# Altium PCB MyPCB1 — копия.PcbDoc
Units mm, origin at the board's own origin, x right, y up, seen from the top; angles counter-clockwise.
Board outline 134 x 67 mm, 4 copper layers (Top Layer, Difpairs1, Difpairs, Bottom Layer), stack 1.747 mm thick; 52 components, 66 nets, 241 pads, 385 vias.
Unrouted connection lines stored in the file: 186.
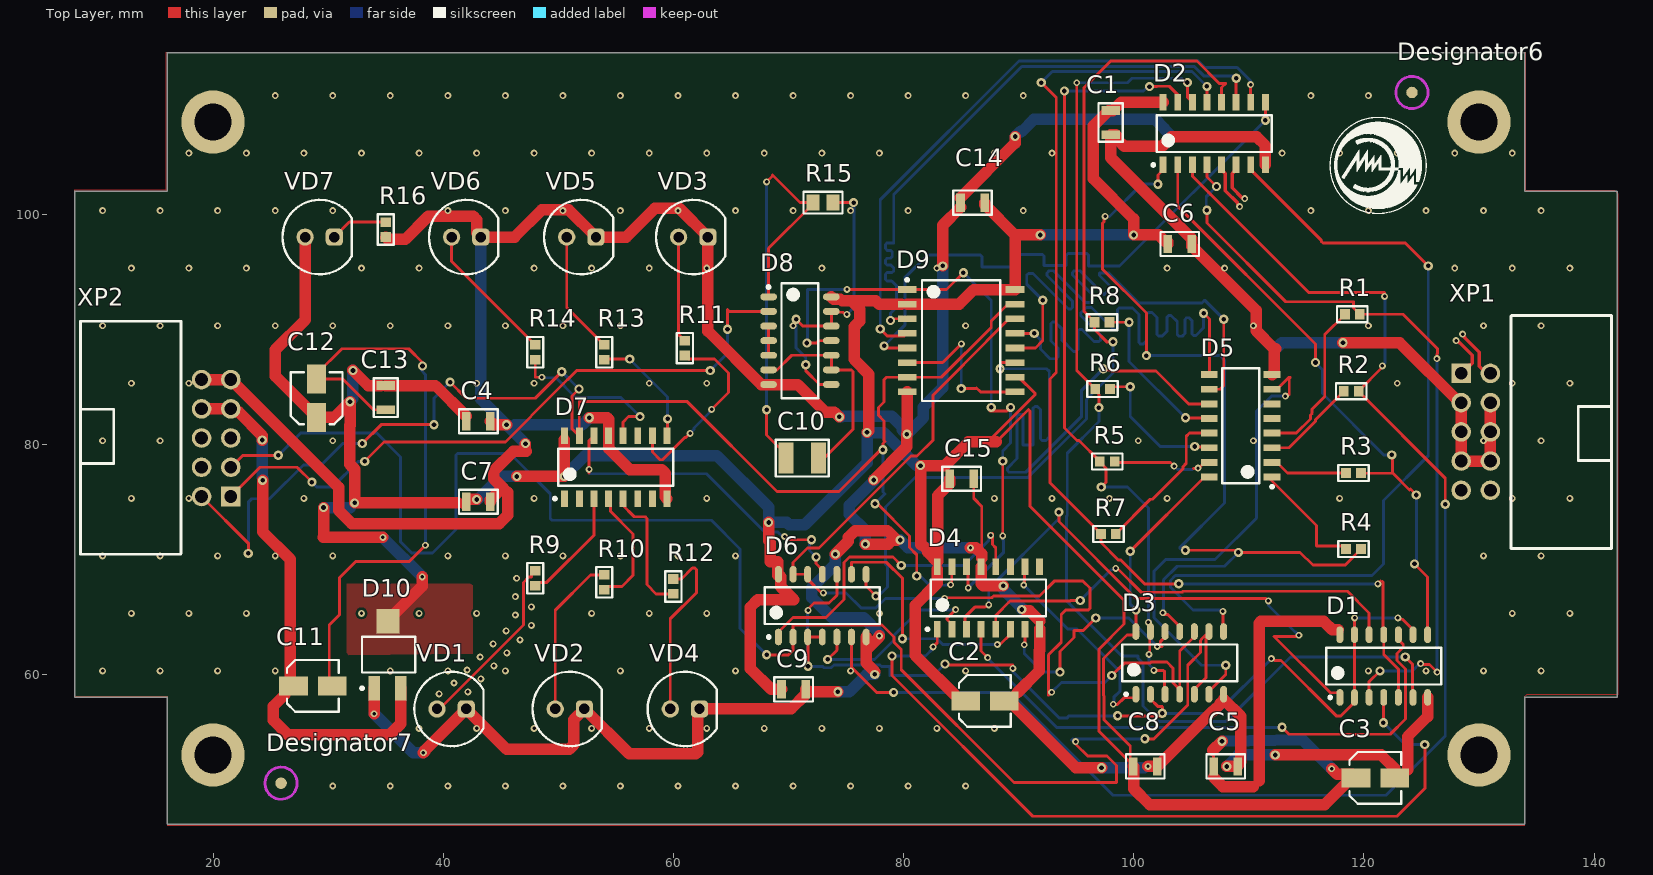
[diagram p0: Top Layer view]
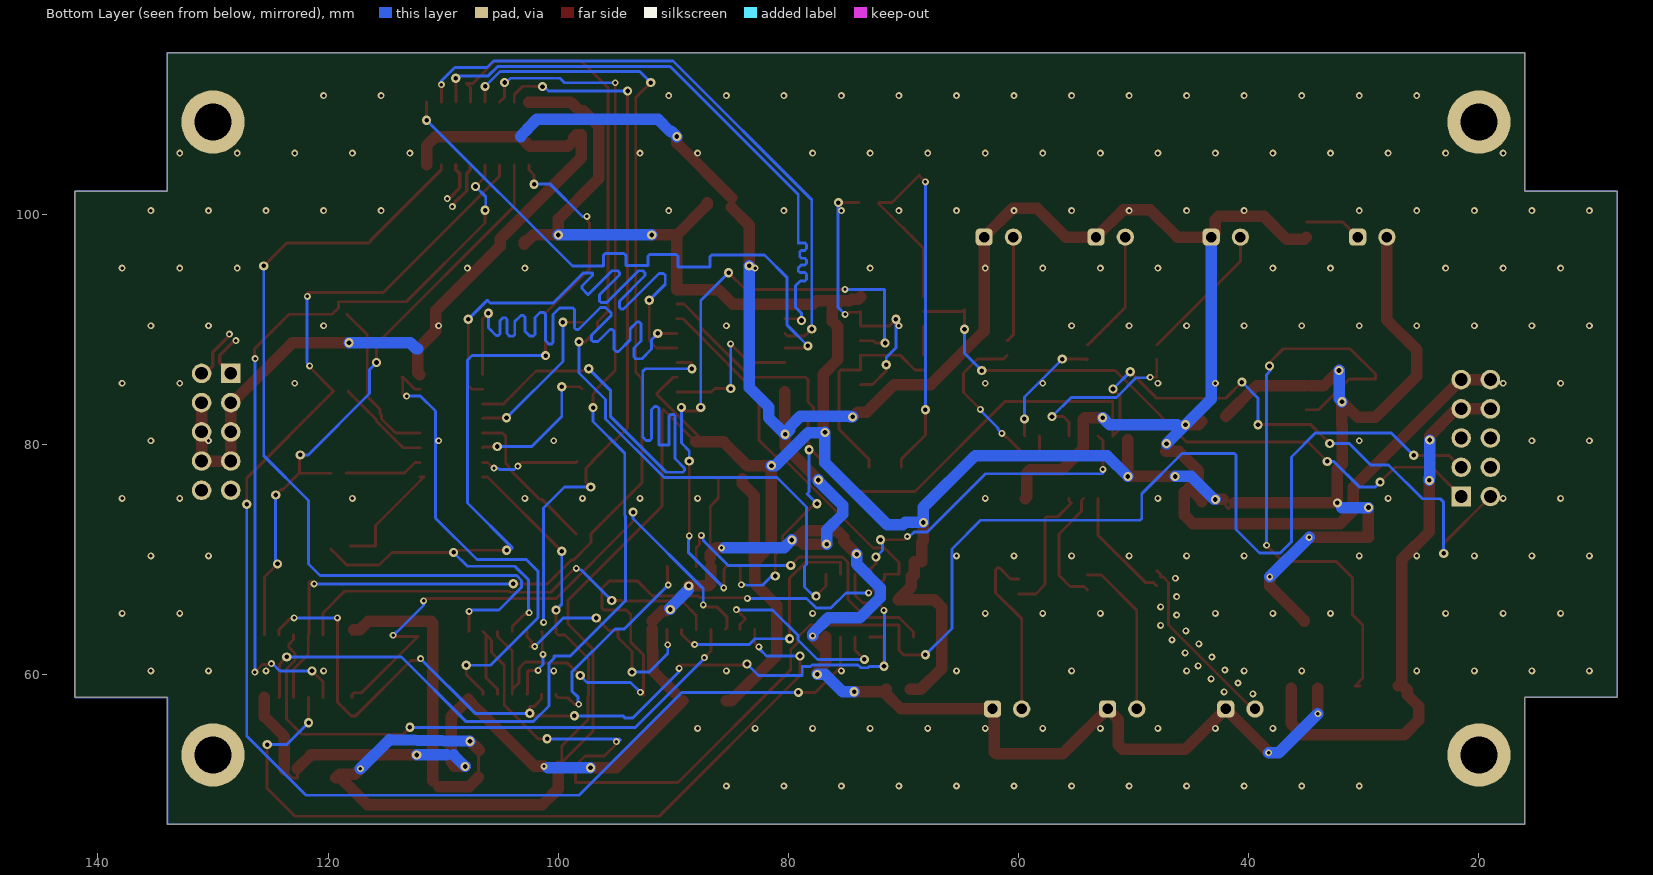
[diagram p1: Bottom Layer view, seen from below]
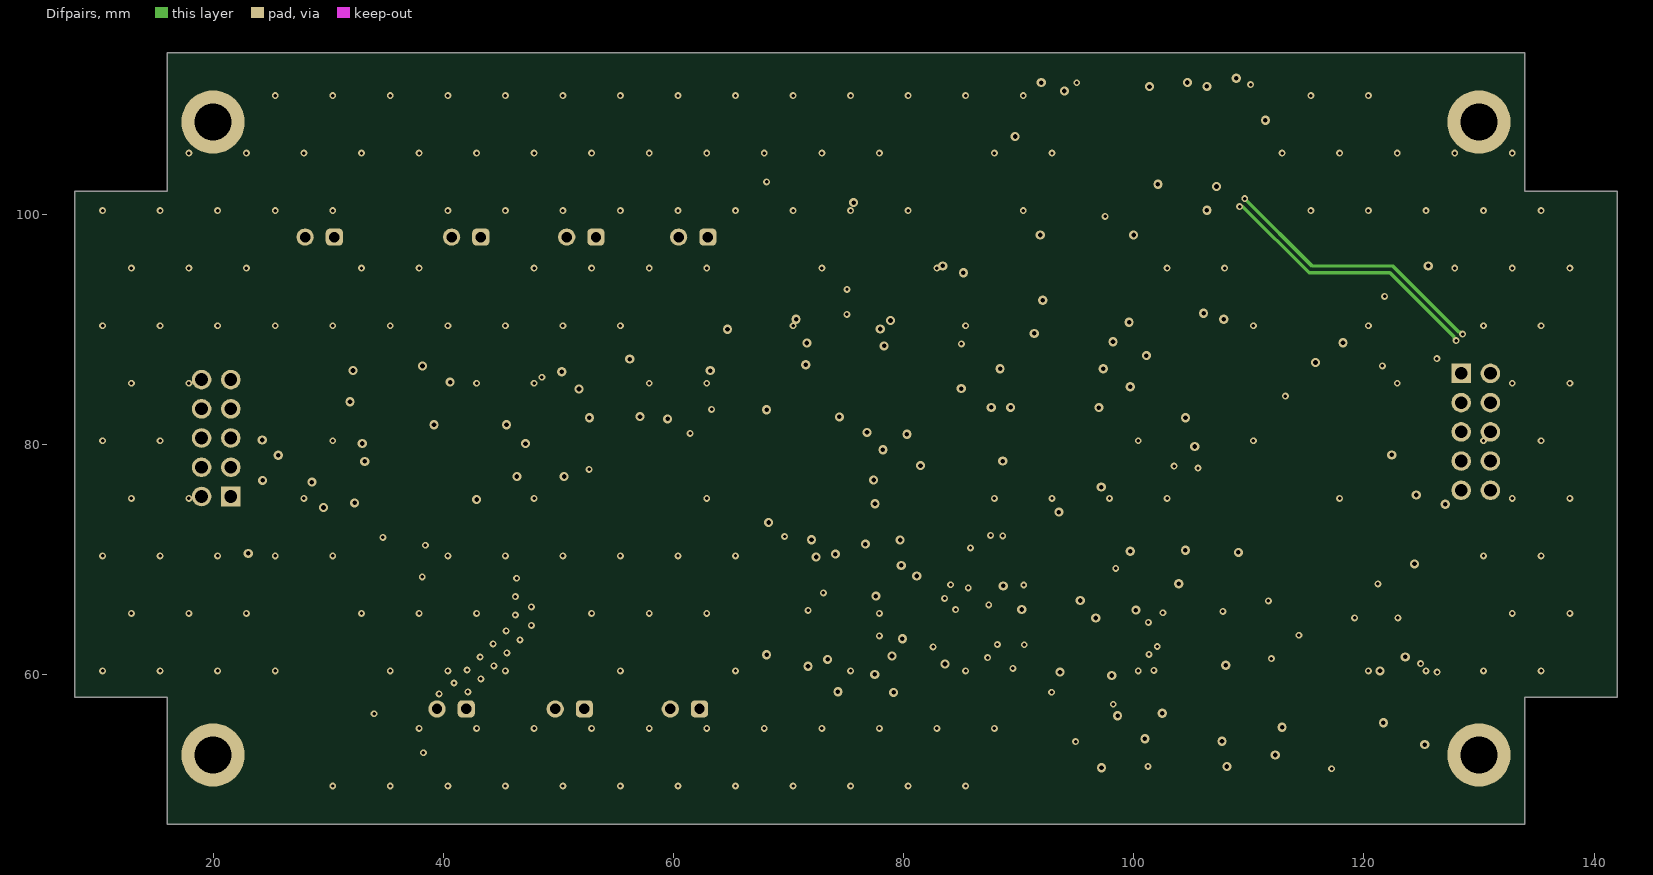
[diagram p2: Difpairs]
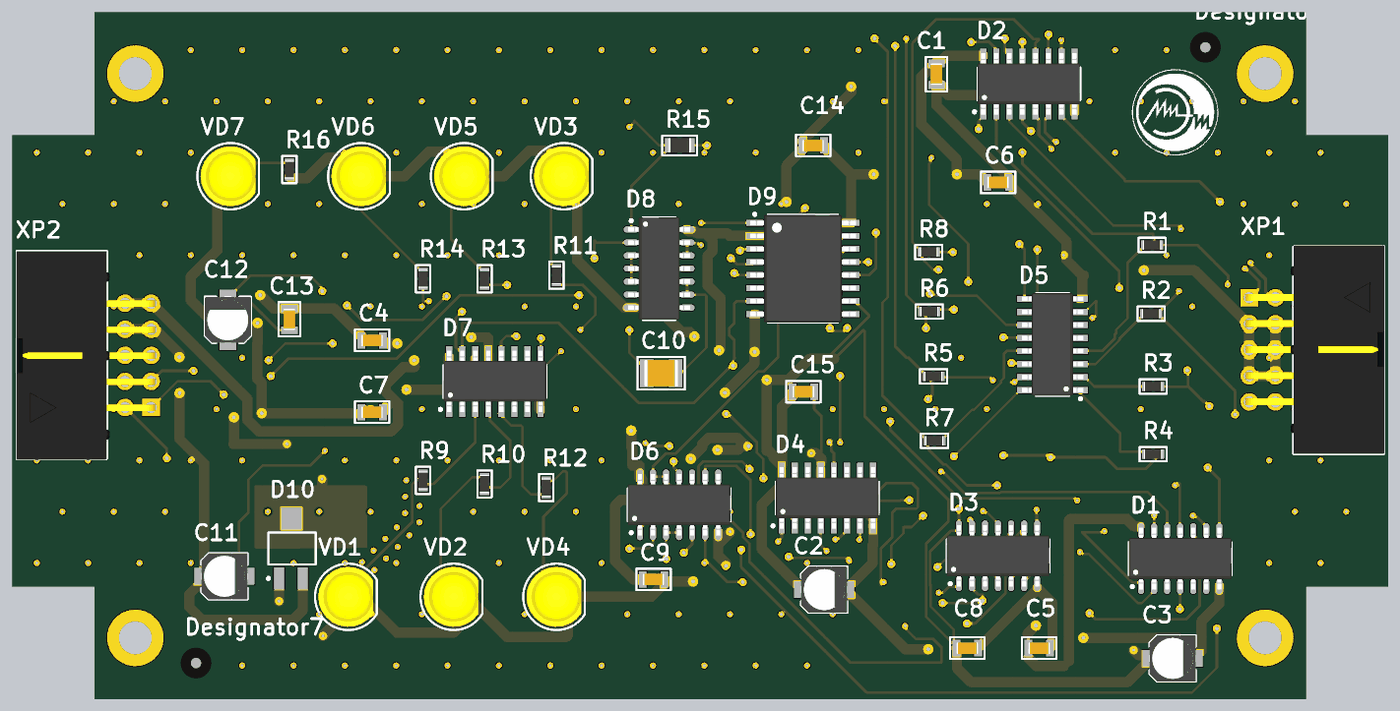
[diagram p3: 3D render of the assembled board from above, using the file's embedded part models]

## Layer stack, top to bottom
Top Solder: solder mask 0.0102, Solder Resist, Dk 3.5
Top Layer: signal copper 0.018
Dielectric 2: prepreg 0.0711, PP-006, Dk 4.1
Difpairs1: signal copper 0.035
Dielectric 1: core 1.4986, Core-043, Dk 4.3
Difpairs: signal copper 0.035
Dielectric 3: prepreg 0.0711, PP-006, Dk 4.1
Bottom Layer: signal copper 0.018
Bottom Solder: solder mask 0.0102, Solder Resist, Dk 3.5

## Board outline
16,47 134,47 134,58 142,58 142,102 134,102 134,114 16,114 16,102 8,102 8,58 16,58

## Design rules (kind name [scope] priority, off if disabled: settings)
BoardOutlineClearance [All] p1: gap=0.5 ignorepadtopadclearanceinfootprint=FALSE except(0: Arc-SplitContinuation Track-SplitContinuation SMDPad-SplitContinuation THPad-SplitContinuation Via-SplitContinuation Fill-SplitContinuation Poly-SplitContinuation Region-SplitContinuation Text-SplitContinuation)
Clearance [All] p1: gap=0.2 ignorepadtopadclearanceinfootprint=FALSE
DiffPairsRouting [All] p1: maxlimit=0.4 minlimit=0.2 mostfreqgap=0.3 toplayer_minwidth=0.2 toplayer_maxwidth=0.381 toplayer_prefwidth=0.3 midlayer1_maxgap=0.254 midlayer1_minwidth=0.2 midlayer1_maxwidth=0.381 midlayer1_prefwidth=0.3 midlayer2_maxgap=0.254 midlayer2_minwidth=0.2 midlayer2_maxwidth=0.381 midlayer2_prefwidth=0.3 bottomlayer_minwidth=0.2 bottomlayer_maxwidth=0.381 bottomlayer_prefwidth=0.3 maxuncoupledlength=12.7
PolygonConnect [All] p1: connectstyle=Direct reliefconductorwidth=0.254 reliefentries=4 polygonreliefangle="90 Angle" airgapwidth=0.254
RoutingVias [All] p1: holewidth=0.4 width=0.8 viastyle="Through Hole" minholewidth=0.3 minwidth=0.6 maxholewidth=0.9 maxwidth=1.27
SolderMaskExpansion [All] p1: expansion=0.102
Width [All] p1: maxlimit=1 minlimit=0.2 preferedwidth=0.25
29 further rules are at their usual default settings.

## Classes and differential pairs
net class S[0..5]: S0 S1 S2 S3 S4 S5
net class ABC[0..7]: ABC0 ABC1 ABC2 ABC3 ABC4 ABC5 ABC6 ABC7
component class ivt33_kuznecov_list2_9var: C10 C11 C12 C13 C14 C15 D8 D9 R15 R16 VD7 XP2
component class ivt33_kuznecov_list1_9var: C1 C2 C3 C4 C5 C6 C7 C8 C9 D1 D2 D3 D4 D5 D6 D7 R1 R2 R3 R4 R5 R6 R7 R8 R9 R10 R11 R12 R13 R14 VD1 VD2 VD3 VD4 VD5 VD6 XP1
differential pair Out2: +Out2_P -Out2_N
differential pair Out1: +Out1_P -Out1_N

## Components (designator, comment, footprint, x,y, rotation, side; value= is the part's Value field where it differs from the comment)
C1 "" 0805_N 98,107.95 r90 top
C2 "*" CA010M0010REB-0405 87.075,57.7 r0 top
C3 "*" CA010M0010REB-0405 121,51 r0 top
C4 "" 0805_N 43.05,82 r180 top
C5 "" 0805_N 108,52 r0 top
C6 "" 0805_N 104,97.4 r180 top
C7 "" 0805_N 43.05,75 r180 top
C8 "" 0805_N 101,52 r0 top
C9 "" 0805_N 70.45,58.7 r180 top
C10 "1210" K10-79_3.2_2.5(1210) 71.2,78.8 r0 top
C11 "*" CA010M0010REB-0405 28.675,59 r0 top
C12 "*" CA010M0010REB-0405 29,84 r90 top
C13 "" 0805_N 35,84.05 r90 top
C14 "" 0805_N 86,101 r0 top
C15 "" 0805_N 85.05,77 r180 top
D1 "74AC00SC" SO14-N 121.73,60.725 r90 top
D2 "SOIC-16" SO16-N 107,107 r90 top
D3 "74AC00SC" SO14-N 104,61 r90 top
D4 "SOIC-16" SO16-N 87.376,66.642 r90 top
D5 "SOIC-16" SO16-N 109.3,81.6 r180 top
D6 "74AC00SC" SO14-N 72.94,65.975 r90 top
D7 "SOIC-16" SO16-N 55,78 r90 top
D8 "74AC00SC" SO14-N 71,89 r0 top
D9 "MC14520BDWG \"Motorola\"" SOIC-16W-N 85,89 r0 top
D10 "LM1117DTX" LM1117DTX-5.0/NOPB 36.297,61.722 r90 top
Designator6 "Comment" PCBComponent_1 124.181,110.566 r0 top
Designator7 "Comment" PCBComponent_1 25.908,50.546 r0 top
R1 "Р1-12-0,1 * 5%-M-\"A\" АЛЯР.434110.005 ТУ" RES_0603_1608_N 119,91.3 r180 top
R2 "Р1-12-0,1 * 5%-M-\"A\" АЛЯР.434110.005 ТУ" RES_0603_1608_N 118.9,84.6 r180 top
R3 "Р1-12-0,1 * 5%-M-\"A\" АЛЯР.434110.005 ТУ" RES_0603_1608_N 119.1,77.5 r180 top
R4 "Р1-12-0,1 * 5%-M-\"A\" АЛЯР.434110.005 ТУ" RES_0603_1608_N 119.1,70.9 r180 top
R5 "Р1-12-0,1 * 5%-M-\"A\" АЛЯР.434110.005 ТУ" RES_0603_1608_N 97.7,78.5 r0 top
R6 "Р1-12-0,1 * 5%-M-\"A\" АЛЯР.434110.005 ТУ" RES_0603_1608_N 97.3,84.8 r0 top
R7 "Р1-12-0,1 * 5%-M-\"A\" АЛЯР.434110.005 ТУ" RES_0603_1608_N 97.8,72.2 r0 top
R8 "Р1-12-0,1 * 5%-M-\"A\" АЛЯР.434110.005 ТУ" RES_0603_1608_N 97.25,90.6 r0 top
R9 "Р1-12-0,1 * 5%-M-\"A\" АЛЯР.434110.005 ТУ" RES_0603_1608_N 48,68.35 r90 top
R10 "Р1-12-0,1 * 5%-M-\"A\" АЛЯР.434110.005 ТУ" RES_0603_1608_N 54,68 r90 top
R11 "Р1-12-0,1 * 5%-M-\"A\" АЛЯР.434110.005 ТУ" RES_0603_1608_N 61,88.35 r90 top
R12 "Р1-12-0,1 * 5%-M-\"A\" АЛЯР.434110.005 ТУ" RES_0603_1608_N 60,67.65 r90 top
R13 "Р1-12-0,1 * 5%-M-\"A\" АЛЯР.434110.005 ТУ" RES_0603_1608_N 54,88 r90 top
R14 "Р1-12-0,1 * 5%-M-\"A\" АЛЯР.434110.005 ТУ" RES_0603_1608_N 48,88 r90 top
R15 "0805" RES_0805_2012_N 73,101 r0 top
R16 "Р1-12-0,1 * 5%-M-\"A\" АЛЯР.434110.005 ТУ" RES_0603_1608_N 35,98.65 r90 top
VD1 "*" LED_5mm 40.73,57 r0 top
VD2 "*" LED_5mm 51,57 r0 top
VD3 "*" LED_5mm 61.73,98 r0 top
VD4 "*" LED_5mm 61,57 r0 top
VD5 "*" LED_5mm 52,98 r0 top
VD6 "*" LED_5mm 42,98 r0 top
VD7 "*" LED_5mm 29.27,98 r0 top
XP1 "TE_1-1634689-0" BH-10R 129.73,81.08 r180 top
XP2 "TE_1-1634689-0" BH-10R 20.27,80.54 r0 top

## Footprints (in the part's own frame and the unit in brackets; to place one, negate y for a bottom-side part, rotate by r counter-clockwise, add the part's x,y. Pads: shape width x height; smd on the part's side, far side on the other; paste and mask are expansions set on the pad)
0805_N [mm] "Резистор, конденсатор"
  rect 0.75x1.6 smd: 1(-1.05,0) 2(1.05,0)
  silkscreen extent -1.67,-1.05 1.67,1.05, body extent -1.05,-0.58 1.05,0.58, height 1
BH-10R [mm] "Разъем угловой 2х5х2,54 типа ВН"
  rect 1.7x1.7 hole 1.1: 1(1.27,-5.08)
  round 1.7 hole 1.1: 2(-1.27,-5.08) 3(1.27,-2.54) 4(-1.27,-2.54) 5(1.27,0) 6(-1.27,0) 7(1.27,2.54) 8(-1.27,2.54) 9(1.27,5.08) 10(-1.27,5.08)
  silkscreen extent -11.8,-10.1 -3.05,10.15, body extent -11.85,-10.2 1.65,10.15, height 9.13
CA010M0010REB-0405 [mm] "Aluminum Electrolytic Capacitor, Body 4,30x4,30x6,30mm, IPC Medium Density"
  rect 2.5x1.65 smd: +(-1.675,0) -(1.675,0)
  silkscreen extent -2.25,-2.25 2.25,2.25, body extent -2.3,-2.25 2.3,2.25, height 6.3
K10-79_3.2_2.5(1210) [mm]
  rect 1.3x2.7 smd: 1(-1.4,0) 2(1.4,0)
  silkscreen extent -2.3,-1.6 2.3,1.6, body extent -1.65,-1.3 1.65,1.3, height 1.75
LED_5mm [mm]
  round 1.5 hole 0.9: A(-1.27,0)
  rrect50% 1.5x1.5 hole 0.9: C(1.27,0)
  silkscreen extent -3.24,-3.24 2.78,3.24, body extent -2.92,-2.92 2.41,2.92, height 10.71
LM1117DTX-5.0/NOPB [mm] "SOT223, 4-Leads, Body 6,50x7,00mm (avg), Pitch 2,30mm, IPC Medium Density"
  rect 2.15x1 smd: 1(-2.925,2.3) 2(-2.925,0)
  rect 2.15x2 smd: 3(2.9,1.1)
  silkscreen extent -3.05,-1.27 1.55,3.47, body extent -1.85,-1.27 1.85,3.35, height 1.8
PCBComponent_1 [mm]
  round 1 smd paste+0 mask+1: reper(0,0)
  Top Layer keep-out circle w0.254: c0,0 r1.397
RES_0603_1608_N [mm] "Chip Resistor, 2-Leads, Body 1,60x0,80mm, IPC Medium Density"
  rect 0.85x0.9 smd: 1(-0.65,0) 2(0.65,0)
  silkscreen extent -1.32,-0.7 1.33,0.7, body extent -0.87,-0.45 0.87,0.45, height 0.55
RES_0805_2012_N [mm] "Rezistor 0805"
  rect 1.15x1.4 smd: 1(-0.875,0) 2(0.875,0)
  silkscreen extent -1.7,-0.95 1.7,0.95, body extent -1.1,-0.7 1.1,0.7, height 0.6
SO14-N [mm]
  oval 1.45x0.6 smd: 1(-2.725,3.81) 2(-2.725,2.54) 3(-2.725,1.27) 4(-2.725,0) 5(-2.725,-1.27) 6(-2.725,-2.54) 7(-2.725,-3.81) 8(2.725,-3.81) 9(2.725,-2.54) 10(2.725,-1.27) 11(2.725,0) 12(2.725,1.27) 13(2.725,2.54) 14(2.725,3.81)
  silkscreen extent -2.85,-5 1.6,5, body extent -3,-5 3,5, height 1.45
SO16-N [mm] "SOIC, 16-Leads, Body 9,90x3,90mm, Pitch 1,27mm, IPC Medium Density"
  rect 1.45x0.6 smd: 1(-2.725,4.445) 2(-2.725,3.175) 3(-2.725,1.905) 4(-2.725,0.635) 5(-2.725,-0.635) 6(-2.725,-1.905) 7(-2.725,-3.175) 8(-2.725,-4.445) 9(2.725,-4.445) 10(2.725,-3.175) 11(2.725,-1.905) 12(2.725,-0.635) 13(2.725,0.635) 14(2.725,1.905) 15(2.725,3.175) 16(2.725,4.445)
  silkscreen extent -2.85,-5 1.6,5.42, body extent -3,-5 3,5, height 1.45
SOIC-16W-N [mm] "SOIC, 16-Leads, Body 10,30x7,50mm, Pitch 1,27mm, IPC Medium Density"
  rect 1.62x0.58 smd: 1(-4.69,4.445) 2(-4.69,3.175) 3(-4.69,1.905) 4(-4.69,0.635) 5(-4.69,-0.635) 6(-4.69,-1.905) 7(-4.69,-3.175) 8(-4.69,-4.445) 9(4.69,-4.445) 10(4.69,-3.175) 11(4.69,-1.905) 12(4.69,-0.635) 13(4.69,0.635) 14(4.69,1.905) 15(4.69,3.175) 16(4.69,4.445)
  silkscreen extent -4.81,-5.25 3.4,5.41, body extent -5.15,-5.25 5.15,5.25, height 2.65

## Part data
C1 C4 C5 C6 C7 C8 C9 C13 C14 C15: library part К10-79_0805_Н90, "Чип конденсатор 0805 Н90 ряд Е6", Case=0805, Manufacturer="ООО \"Кулон\"", Tolerance=+80%-20%, BOM="К10-79-*-B-*+80%-20%-Н90 АЖЯР.673511.004 ТУ", Created_by=Желобаев, Issue_date=19_12_2018, Name=К10-79, Name2="Конденсатор К10-79", TKE=Н90, TU="АЖЯР.673511.004 ТУ", Type=K10-79, Version=0, Weight=0.05
C2 C3 C11 C12: library part CA010M0010REB-0405, "Электролитический SND"
C10: library part К10-79_1210_Н30, "Чип конденсатор 1210 Н30 ряд Е6", Manufacturer="ООО \"Кулон\"", Tolerance=±20%, BOM="Конденсатор К10-79-*-B-*±20%-Н30 АЖЯР.673511.004 ТУ", Datum=19_12_2018, HelpURL=\\papa\Info\Altium_Library\Даташиты_и_ТУ\Конденсаторы_отечественные\К10-79_АЖЯР_673511_004ТУ.pdf, Hight=1.75, LibraryEngeneer=Желобаев, LiveStatus=производится, Name="Конденсатор К10-79", Packing=катушка, Permit MPSU=разрешен, Reliability=0.000005, Size=1210, TKE=Н30, TU="АЖЯР.673511.004 ТУ", Type=K10-79, Version=00, Weight=0.2
D1 D3 D6 D8: "4 элемента 2И-НЕ TTL SOIC-14", Case=SOIC-14, Manufacturer="ON Semiconductor", Power_Voltage="4.5 - 5.5 V", BOM="74AC00SC \"ON Semiconductor\"", Created_by=Желобаев, Issue_date=10.04.2019, Name=74AC00SC, Name2="Микросхема 74AC00SC", Version=0
D2 D5: library part 74HCT151D, "мультиплексор 8 канальный TTL", Manufacturer="NXP Semiconductors", Power_Voltage="4.5 -5.5 V", BOM="74HCT151D \"NXP Semiconductors\"", Case=SOIC-16, Created_by=Желобаев, Issue_date=05.04.2019, Name=74HCT151D, Name2="Микросхема 74HCT151D", Version=0
D4 D7: library part HCF4017BM1, "Декадный счетчик c 10 декодированными выходами", Manufacturer=STMicroelectronics, Power_Voltage="-0.5 -22 V", BOM="HCF4017BM1 \"STMicroelectronics\"", Case=SOIC-16, Created_by=Желобаев, Issue_date=05.04.2019, Name=HCF4017BM1, Name2="Микросхема HCF4017BM1", Version=0
D9: library part MC14520BDWG, "Два двоичных счетчика", Case=SOIC-16, Manufacturer=Motorola, BOM="MC14520BDWG \"Motorola\"", Created_by=Желобаев, Issue_date=6.01.2019, Name=MC14520BDWG, Name2="Микросхема MC14520BDWG", Version=0
D10: library part LT1117
R1 R2 R3 R4 R5 R6 R7 R8 R9 R10 R11 R12 R13 R14 R16: library part Р1-12-0,1-5%, "Резистор от 0,75 Ом до 10 МОм", Case=0603, Manufacturer="ОАО \"НПО \"Эркон\"", Tolerance=5%, Voltage=50, BOM="Р1-12-0,1 * 5%-M-\"A\" АЛЯР.434110.005 ТУ", Created_by=Желобаев, Issue_date=10.04.2019, Name=Р1-12-0,1, Name2="Резистор Р1-12-0,1", Size=0603, TKR=M, TU="АЛЯР.434110.005 ТУ", Type="Р1-12-0,1±5%-М-\"А\"", Version=00, Weight=0,005
R15: library part Р1-12-0,125-5%, "Резистор от 0,75 Ом до 2 МОм", Manufacturer="ОАО \"НПО \"Эркон\"", Tolerance=5%, Voltage=150, BOM="Р1-12-0,125 * 5%-M-\"A\" АЛЯР.434110.005 ТУ", Case=0805, Created_by=Желобаев, Issue_date=05_12_2018, Name=Р1-12-0,125, Name2="Резистор Р1-12-0,125", Size=0805, TKR=M, TU="АЛЯР.434110.005 ТУ", Type="Р1-12-0,125±5%-М-\"А\"", Version=00, Weight=0,01
VD1 VD2 VD3 VD4 VD5 VD6 VD7: library part 521-9466, "Светодиод,5мм,жёлтый", Manufacture=Dialight, BOM="521-9466 \"Dialight\"", Name=521-9466
XP1 XP2: "Вилка типа BH-10R угловая правая двухрядная 2х5х2.54", Case=BH-10R, Manufacturer="TE Connectivity", BOM="TE_1-1634689-0 \"TE Connectivity\"", Created_by=Желобаев, Issue_date=13.05.2019, Name=TE_1-1634689-0, Name2="Вилка угловая TE_1-1634689-0", Version=0

## Free pads (board coordinates)
  round 5.5 hole 3.2: M1(20,108) M2(130,108) M3(130,53) M4(20,53)

## Via types
v1: diameter 0.6, hole 0.3, Top Layer to Bottom Layer, 260 vias
v2: diameter 0.8, hole 0.4, Top Layer to Bottom Layer, 125 vias

## Nets (pads, with @x,y where several pads share a name; then routed paths per layer and width w, separated by ;. In a path a pad name is that pad's centre, name@x,y a point inside that pad or via, vN(x,y) a via of type N, cw(c..) or ccw(c..) an arc to the next point about the centre after c; other vN are vias at no path point)
+5V: C1.2 C2.+ C3.+ C4.2 C5.1 C6.2 C7.2 C8.1 C9.2 C12.+ C13.2 C14.2 C15.2 D1.14 D2.16 D3.14 D4.16 D5.16 D6.14 D7.16 D8.14 D9.2 D9.10 D9.16 D10.3 VD7.A | length 403.5
  Top Layer w0.25: C13.2@34.575,85.1 C13.2 ; 41.25,74.9 41.75,74.4 42,74.65 C7.2 C7.2@42.2,75.2 ; C4.2 C4.2@42,82.425 ; D9.2@79.79,92.175 D9.2 ; 87.325,80.2 91.445,84.32 91.445,84.399 90.019,85.825 D9.10 ; 88.049,80.2 90.856,83.007 91,82.863 91,74.608 99.162,66.446 99.162,64.37 97,62.208 97,55.046 C8.1@99.7,52.346 ; v2(99.7,70.705) 106.15,77.155 D5.16 ; C8.1 99.7,52.25 C8.1@99.7,52.346 ; v2(100.19,65.586) D3.14 100.19,63.587 100.028,63.425 99.417,63.425 97.375,61.383 97.375,58.153 97.434,58.093 97.434,56.045 99.7,53.78 C8.1@99.7,52.346 ; 106.875,53.399 106.95,53.324 C5.1 106.95,51.05 ; 110.395,50.241 110.9,50.746 ; 110.9,64.454 111.046,64.6 ; D1.14@117.758,63.878 117.92,63.717 D1.14
  Top Layer w1: VD7.A 28,90.8 25.4,88.2 25.4,85.925 C12.+ 30.525,82.325 v2(31.9,83.7) 31.9,81.668 31.869,81.637 31.869,78.259 32.3,77.828 v2(32.3,74.9) 41.25,74.9 ; v2(29.6,74.5) 29.6,71.942 29.558,71.9 v1(34.755,71.9) ; v2(32.156,86.411) 33.467,85.1 C13.2@34.575,85.1 ; C13.2 39.325,85.1 C4.2@42,82.425 ; D10.3 35.197,64.697 38.176,67.677 v1(38.176,68.478) ; C7.2@42.2,75.2 v2(42.9,75.2) ; v2(46.4,77.2) v2(50.5,77.2) D7.16@50.5,80.38 ; v2(68.275,73.203) 68.275,71.622 68.4,71.497 68.4,69.8 69.063,69.8 69.063,68.633 D6.14 69.33,68.5 69.33,67.624 70.477,66.477 67.323,66.477 66.7,65.854 66.7,60.5 68.5,58.7 C9.2 ; D8.14 73.925,92.61 74.512,92.61 74.672,92.45 77.597,92.45 77.872,92.175 D9.2@79.79,92.175 ; 75.476,92.45 76.182,91.743 76.182,90.686 75.71,90.213 75.71,87.371 76.987,86.093 76.987,81.187 v2(76.826,81.026) ; D9.2 84.825,92.175 86.095,93.445 D9.16 89.69,98.185 ; D4.16@82.931,69.142 82.931,67.926 81,65.995 81,61.675 84.975,57.7 C2.+ ; C15.2 84,76.575 82.955,75.53 82.955,69.85 82.931,69.792 82.125,70.598 82.125,70.764 81.642,71.247 81.476,71.247 v2(81.476,78.142) 83.578,78.142 85.636,80.2 87.325,80.2 88.049,80.2 ; C14.2 87.05,100.825 89.69,98.185 ; v2(91.886,98.185) 89.69,98.185 ; C8.1 99.994,51.956 99.994,50.074 101.376,48.692 116.592,48.692 118.9,51 C3.+ 119,51.325 117.675,51.325 v1(117.2,51.8) ; D2.16 98.9,109.725 98.175,109 C1.2 97.825,109 96.5,107.675 96.5,103.069 99.988,99.581 v2(99.988,98.185) 102.165,98.185 102.65,97.7 102.825,97.7 102.95,97.575 C6.2 ; 106.875,53.399 v2(107.675,54.198) ; 106.95,51.05 107.759,50.241 110.395,50.241 ; 110.9,50.746 110.9,64.454 ; 111.046,64.6 116.523,64.6 117.245,63.878 D1.14@117.758,63.878
  Bottom Layer w0.25: 31.9,74.5 v2(32.3,74.9) ; v2(99.7,70.705) 99.7,66.096 100.2,65.596 v2(100.19,65.586)
  Bottom Layer w1: v2(29.6,74.5) 31.9,74.5 ; v2(31.9,83.7) 32.156,83.956 v2(32.156,86.411) ; v1(34.755,71.9) v1(38.176,68.478) ; v2(42.9,75.2) 43,75.2 45,77.2 v2(46.4,77.2) ; v2(50.5,77.2) 52.312,79.012 63.788,79.012 68.275,74.525 v2(68.275,73.203) 69.856,73.203 70.059,73 71.425,73 76.826,78.401 v2@76.826,81 ; v2(76.826,81.026) v2@76.826,81 ; v2(81.476,78.142) 81.147,78.142 78.29,81 v2@76.826,81 ; v2(91.886,98.185) v2(99.988,98.185) ; v2(107.675,54.198) 114.7,54.3 v1(117.2,51.8)
+9V: C11.+ D10.2 XP2.7 XP2.8 | length 48.1
  Top Layer w0.25: XP2.7 XP2.7@21.817,82.803 ; C11.+@26.7,59.3 C11.+
  Top Layer w1: XP2.8 XP2.7 ; XP2.7@21.817,82.803 22.226,82.803 24.282,80.747 v2(24.282,80.366) ; v2(24.3,76.86) 24.3,72.4 26.7,70 C11.+@26.7,59.3 ; C11.+ 26.575,59 26.25,58.675 26.25,58.25 25.248,57.248 25.248,56.007 26.492,54.762 35.357,54.762 36.297,55.702 D10.2
  Bottom Layer w1: v2(24.282,80.366) 24.282,77.118 24.3,77.1 v2(24.3,76.86)
ABC0: D1.3 D2.4 R1.1 | length 67.2
  Top Layer w0.25: v2(106.365,100.33) 106.365,99.235 113.22,92.38 119.1,92.38 119.1,91.85 119.325,91.625 119.35,91.625 119.65,91.325 R1.1 123.4,91.3 126.4,88.3 126.4,87.9 126.351,87.851 v1(126.351,87.441) ; D2.4 106.365,103.235 v2(107.2,102.4) ; D1.3 120.46,59.36 v2(121.4,60.3) ; v1(124.935,60.935) 125.002,60.868 125.695,60.868 v1(126.365,60.198)
  Bottom Layer w0.25: v2(106.365,100.33) 106.3,100.395 106.3,101.5 v2(107.2,102.4) ; v2(121.4,60.3) 124.2,60.3 v1@124.835,60.935 ; v1@124.739,60.935 v1@124.835,60.935 ; v1(124.935,60.935) v1@124.835,60.935 ; 126.351,61.051 v1(126.351,87.441) ; v1(126.365,60.198) 126.365,61.087
ABC1: D2.3 D6.6 R2.1 | length 125.6
  Top Layer w0.25: D6.6 75.48,60.62 77.665,58.435 v2(79.134,58.435) ; D2.3 105.095,103.305 115.2,93.2 121.8,93.2 v1(121.8,92.855) ; v1@121.615,86.716 v1(121.615,86.815) ; v1@121.628,86.703 119.55,84.625 R2.1 119.55,84.575 127.076,77.049 v2(127.076,74.778)
  Bottom Layer w0.25: v2(79.134,58.435) 89.265,58.435 98.2,49.5 121.925,49.5 127.076,54.651 v2(127.076,74.778) ; v1(121.615,86.815) 121.85,87.05 v1@121.85,92.805 ; v1(121.8,92.855) v1@121.85,92.805 ; v1@121.945,92.71 v1@121.85,92.805
ABC2: D1.8 D2.2 R3.1 | length 55.2
  Top Layer w0.25: D2.2 103.825,100.675 115.8,88.7 v2(115.8,87.1) ; R3.1 119.77,77.48 122.52,77.48 123.978,76.022 122.5,77.505 122.5,79 v2(122.425,79.075) ; 124.054,76.098 v2(124.562,75.59) ; v2(124.4,69.6) 125.54,68.46 D1.8
  Bottom Layer w0.25: v2(115.8,87.1) 115.8,87.079 116.4,86.479 116.4,84.4 121.725,79.075 v2(122.425,79.075) ; v2(124.4,69.6) 124.562,69.762 v2(124.562,75.59)
ABC3: D2.1 D3.11 R4.1 | length 76
  Top Layer w0.25: v1(97.511,99.797) 97.405,99.691 97.405,99.305 97.3,99.2 97.3,95.2 101.1,91.4 v2(101.1,87.7) ; v2(102.1,102.6) 102.1,103.395 102.555,103.85 D2.1 ; v1(102.54,65.36) 102.705,65.195 102.955,65.195 104,64.15 D3.11 ; v2(104.496,70.79) 108.91,70.79 v2(109.1,70.6) 114.464,70.6 115.57,69.494 118.379,69.494 119.2,70.315 119.2,70.325 119.75,70.875 R4.1
  Bottom Layer w0.25: v1(97.511,99.797) 97.897,99.797 100.7,102.6 v2(102.1,102.6) ; v2(101.1,87.7) 107.5,87.7 107.9,87.3 107.9,74.9 104,71 104.21,70.79 v2(104.496,70.79) ; v1(102.54,65.36) 102.54,65.684 ; 102.6,65.684 102.6,68.219 103.781,69.4 107.9,69.4 v2(109.1,70.6)
ABC4: D2.15 D3.3 D3.13 R5.1 | length 68.8
  Top Layer w0.25: v2(93.979,110.694) 93.979,81.409 95.072,80.317 95.258,80.317 97.05,78.525 R5.1 97.05,78.465 97.6,77.915 97.6,76.696 v2(97.18,76.276) ; v1(101.27,64.516) v1@101.27,64.541 ; v1(101.332,61.736) 101.396,61.8 101.396,63.661 D3.13 ; v2(101.371,111.075) 102.033,111.075 102.064,111.107 103.093,111.107 103.825,110.375 D2.15 ; v1(101.752,60.35) 102.591,60.35 102.665,60.276 102.665,58.34 D3.3
  Bottom Layer w0.25: v2(93.979,110.694) 100.841,110.694 101.222,111.075 v2(101.371,111.075) ; v2(97.18,76.276) 99.473,76.276 101.295,74.454 v1@101.295,64.541 ; v1(101.27,64.516) v1@101.295,64.541 ; v1(101.332,61.736) 101.332,60.866 101.752,60.445 v1(101.752,60.35) ; v1@101.46,64.575 101.329,64.575 v1@101.295,64.541
ABC5: D1.6 D2.14 R6.1 | length 101
  Top Layer w0.25: v1@95.047,111.404 v1(95.054,111.412) 95.054,86.421 96.65,84.825 R6.1 96.8,84.65 96.723,84.573 96.977,84.319 v2(96.977,83.185) ; v2(104.67,111.433) 104.67,110.155 105.097,109.727 D2.14 ; v2(123.596,61.519) 124.235,60.88 124.235,58.035 D1.6
  Bottom Layer w0.25: v1(95.054,111.412) 99.458,111.412 99.846,111.8 104.154,111.8 104.521,111.433 v2(104.67,111.433) ; v2(96.977,83.185) 96.977,81.977 94.225,79.225 94.225,73.8 94.169,73.744 94.169,66.394 98.964,61.6 100.354,61.6 100.375,61.579 100.375,61.4 100.813,60.962 100.813,57.268 102.189,55.892 107.992,55.892 113.619,61.519 v2(123.596,61.519)
ABC6: D1.5 D1.11 D2.13 R7.1 | length 95.8
  Top Layer w0.25: v2(91.973,111.43) 93.275,110.128 93.275,86.23 92.725,85.68 92.725,76.65 97.15,72.225 R7.1 97.15,71.45 98.675,69.925 98.9,69.925 100.957,67.869 v2(103.911,67.869) ; D2.13 v2(106.365,111.094) ; v1(121.22,67.869) 121.451,68.1 ; 121.633,68.068 121.665,68.035 121.665,63.515 D1.11 121.73,61.723 123,60.453 D1.5
  Bottom Layer w0.25: v2(91.973,111.43) 92.928,112.384 105.074,112.384 v2(106.365,111.094) ; v2(103.911,67.869) v1(121.22,67.869)
ABC7: D2.12 D6.8 R8.1 | length 78.2
  Top Layer w0.25: D6.8 76.75,67.674 77.355,67.068 77.343,67.056 v2(77.599,66.8) ; v2(98.2,88.9) 97.663,88.9 96.6,89.963 R8.1 96.6,90.625 95.675,91.55 95.675,110.975 98,113.3 105.496,113.3 107.438,111.358 108,111.358 107.635,110.993 D2.12
  Bottom Layer w0.25: v2(77.599,66.8) 77.8,66.8 78.6,67.6 78.6,69.375 78.435,69.54 78.435,74.535 81,77.1 90.8,77.1 95.9,82.2 95.9,83.9 98.2,86.2 v2(98.2,88.9)
GND: C1.1 C2.- C3.- C4.1 C5.2 C6.1 C7.1 C8.2 C9.1 C14.1 C15.1 D1.7 D2.8 D3.7 D4.8 D4.13 D5.8 D6.7 D7.8 D7.13 D8.7 D9.8 D10.1 R16.1 VD1.C VD2.C VD3.C VD4.C VD5.C VD6.C XP1.3 XP1.4 XP1.5 XP1.6 XP1.7 XP1.8 XP2.9 XP2.10 | length 459.2
  Top Layer w0.25: C4.1@43.887,82.212 C4.1@44.113,82.438 ; C4.1 44.1,81.75 C4.1@44.35,81.5 ; v2(77.5,60) v2@77.5,60.249 ; 79.272,71.679 79.421,71.679 v2(79.705,71.679) ; C14.1@84.95,100.575 C14.1 C14.1@84.95,101.425 ; C15.1 86.1,75.3 86.8,74.6 86.8,70.135 ; D4.13 86.776,69.402 D4.13@86.776,70.077 ; C2.- 89.175,57.7 C2.-@89.875,58.4 ; D4.8 D4.8@91.821,64.597 ; D3.7@107.648,57.598 107.648,57.783 D3.7@107.81,57.945 ; D3.7@107.81,57.85 D3.7@107.81,57.945 ; D3.7 D3.7@107.81,57.945 ; C3.-@122.675,51.823 C3.- 123.1,51 C3.-@123.8,51.7
  Top Layer w1: XP2.10 XP2.9 30.9,76.26 30.9,74.272 32.072,73.1 44.853,73.1 45.586,73.832 45.586,75.814 45,76.4 ; v1(33.997,56.58) D10.1 ; R16.1 35.2,97.8 36.7,97.8 38.7,99.8 42.6,99.8 42.9,99.5 42.9,98.37 VD6.C 46.2,98 48.581,100.381 50.889,100.381 VD5.C 55.9,98 58.4,100.5 60.5,100.5 VD3.C 63,89.832 67.642,85.19 D8.7 70.81,85.19 73.2,82.8 74,82.8 v2(74.428,82.372) ; v1(38.278,53.188) v1@38.456,53.365 ; v1@38.411,53.41 VD1.C 45.5,53.5 50.954,53.5 51.343,53.889 51.343,56.073 VD2.C 56.17,53.1 61.954,53.1 62.1,53.246 62.1,56.83 VD4.C 70.225,57 71.5,58.275 C9.1 71.7,58.5 v2(74.3,58.5) ; C7.1 44.1,75.175 45,76.075 45,76.4 ; C4.1 44.4,81.7 v2(45.5,81.7) ; v2(47.147,80.053) 47.147,79.453 47.2,79.4 46.1,79.4 44.4,77.7 44.4,77 45,76.4 ; v2(52.7,82.3) 54.254,82.3 54.365,82.189 D7.13 54.375,80.715 54.375,79.625 56.2,77.8 59,77.8 59.3,77.5 59.3,75.42 D7.8 ; v2(74.076,70.45) 75.203,71.577 75.203,71.903 75.8,72.5 78.6,72.5 v2@79.421,71.679 ; v2(76.683,71.323) 78.674,71.323 79.03,71.679 79.272,71.679 ; D6.7 76.75,62.124 ; v2(77.4,76.896) 80.289,79.786 v2(80.289,80.874) 80.31,80.894 D9.8 ; v2@77.5,60.249 76.75,60.999 76.75,62.124 ; v1(77.902,63.348) 77.902,63.276 76.75,62.124 ; v2(83.4,95.5) 83.4,99.025 C14.1@84.95,100.575 ; C14.1@84.95,101.425 89.695,106.17 v2(89.695,106.738) ; v1(85.818,71) 86.277,71 86.776,70.501 D4.13@86.776,70.077 ; D4.13 86.741,67.877 86.927,67.691 v2(88.671,67.691) ; C2.-@89.175,57.7 94.983,51.892 v2(97.206,51.892) ; C2.-@89.875,58.4 91.775,60.3 91.775,62.042 91.845,62.112 91.845,63.975 D4.8 ; v2@90.626,65.537 90.946,65.537 91.821,64.662 D4.8@91.821,64.597 ; v1(101.243,52) C8.2 106.9,56.85 106.954,56.85 107.54,57.436 107.54,57.49 D3.7@107.648,57.598 ; D3.7@107.81,57.85 109.293,56.367 109.293,52.418 109.05,52.175 C5.2 v2(108.1,52) ; D2.8 111.445,105.955 110.695,106.705 103.284,106.705 102.472,105.894 99.183,105.894 98.675,106.402 98.675,106.65 98.425,106.9 C1.1 98,104.9 105.05,97.85 C6.1 105.05,97.225 110.646,91.629 110.646,89.854 112.2,88.3 ; D5.8 112.2,86.22 112.2,88.3 ; v2(112.3,53) 121.498,53 C3.-@122.675,51.823 ; 112.349,88.3 112.2,88.3 ; v2(118.186,88.824) 123.106,88.824 128.31,83.62 XP1.3 XP1.5 XP1.7 XP1.8 XP1.6 XP1.4 ; C3.-@123.8,51.7 123.8,54.6 125.54,56.34 D1.7
  Bottom Layer w0.25: v2(45.5,81.7) 46.2,81.7 ; v1@85.6,71 v1(85.818,71) ; v2@88.7,67.35 v2@88.7,67.4 ; 109.1,53 109.7,53
  Bottom Layer w1: v1(33.997,56.58) 37.389,53.188 v1(38.278,53.188) ; VD6.C 43.27,83.93 v2(45.5,81.7) v2(47.147,80.053) ; 46.2,81.7 52.1,81.7 v2(52.7,82.3) ; v2(74.076,70.45) 74.076,69.576 72.041,67.541 72.041,66.667 73.786,64.922 76.53,64.922 77.902,63.551 v1(77.902,63.348) ; v2(74.3,58.5) 75.3,58.5 76.8,60 v2(77.5,60) ; v2(74.428,82.372) 74.651,82.372 74.701,82.423 78.974,82.423 79.9,81.497 79.9,81.263 v2(80.289,80.874) 81.705,82.29 81.705,83.229 81.737,83.229 81.737,83.261 83.4,84.924 v2(83.4,95.5) ; v2(76.683,71.323) 76.683,72.517 75.3,73.9 75.3,74.7 77.4,76.8 v2(77.4,76.896) ; v2(79.705,71.679) 80.384,71 v1@85.6,71 ; v2@88.7,67.35 90.3,65.75 v2(90.276,65.642) ; v2(89.695,106.738) 90.17,107.213 ; 90.242,107.142 91.329,108.229 101.875,108.229 102.639,107.465 102.616,107.442 103.279,106.779 103.279,106.7 ; v2(97.206,51.892) 97.214,51.9 100.9,51.9 ; v2(108.1,52) 109.1,53 ; 109.7,53 v2(112.3,53) ; 112.2,88.3 112.349,88.3 112.873,88.824 v2(118.186,88.824)
  other v1: 30.399,50.301 35.399,50.301 40.399,50.301 45.399,50.301 50.399,50.301 55.399,50.301 60.399,50.301 65.399,50.301 70.399,50.301 75.399,50.301 80.399,50.301 85.399,50.301 37.899,55.301 42.899,55.301 47.899,55.301 52.899,55.301 57.899,55.301 62.899,55.301 67.899,55.301 72.899,55.301 77.899,55.301 82.899,55.301 87.899,55.301 39.65,58.301 42.144,58.477 40.938,59.251 43.275,59.608 10.399,60.301 15.399,60.301 20.399,60.301 25.399,60.301 35.399,60.301 40.399,60.301 45.399,60.301 55.399,60.301 65.399,60.301 75.399,60.301 85.399,60.301 100.399,60.301 120.399,60.301 125.399,60.301 130.399,60.301 135.399,60.301 42.069,60.382 44.407,60.739 43.201,61.514 45.538,61.871 44.332,62.645 46.67,63.002 45.463,63.776 47.659,64.259 46.264,65.161 12.899,65.301 17.899,65.301 22.899,65.301 32.899,65.301 37.899,65.301 42.899,65.301 52.899,65.301 57.899,65.301 62.899,65.301 77.899,65.301 132.899,65.301 137.899,65.301 47.665,65.859 46.264,66.761 46.378,68.357 10.399,70.301 15.399,70.301 20.399,70.301 25.399,70.301 30.399,70.301 40.399,70.301 45.399,70.301 50.399,70.301 55.399,70.301 60.399,70.301 65.399,70.301 130.399,70.301 135.399,70.301 12.899,75.301 17.899,75.301 27.899,75.301 47.899,75.301 62.899,75.301 87.899,75.301 92.899,75.301 97.899,75.301 102.899,75.301 117.899,75.301 132.899,75.301 137.899,75.301 10.399,80.301 15.399,80.301 30.399,80.301 100.399,80.301 110.399,80.301 130.399,80.301 135.399,80.301 12.899,85.301 17.899,85.301 42.899,85.301 47.899,85.301 57.899,85.301 62.899,85.301 122.899,85.301 132.899,85.301 137.899,85.301 10.399,90.301 15.399,90.301 20.399,90.301 25.399,90.301 30.399,90.301 35.399,90.301 40.399,90.301 45.399,90.301 50.399,90.301 55.399,90.301 70.399,90.301 85.399,90.301 110.399,90.301 120.399,90.301 130.399,90.301 135.399,90.301 12.899,95.301 17.899,95.301 22.899,95.301 32.899,95.301 37.899,95.301 47.899,95.301 52.899,95.301 57.899,95.301 62.899,95.301 72.899,95.301 82.899,95.301 102.899,95.301 107.899,95.301 127.899,95.301 132.899,95.301 137.899,95.301 10.399,100.301 15.399,100.301 20.399,100.301 25.399,100.301 30.399,100.301 40.399,100.301 45.399,100.301 50.399,100.301 55.399,100.301 60.399,100.301 65.399,100.301 70.399,100.301 75.399,100.301 80.399,100.301 90.399,100.301 115.399,100.301 120.399,100.301 125.399,100.301 130.399,100.301 135.399,100.301 17.899,105.301 22.899,105.301 27.899,105.301 32.899,105.301 37.899,105.301 42.899,105.301 47.899,105.301 52.899,105.301 57.899,105.301 62.899,105.301 67.899,105.301 72.899,105.301 77.899,105.301 87.899,105.301 92.899,105.301 112.899,105.301 117.899,105.301 122.899,105.301 127.899,105.301 132.899,105.301 25.399,110.301 30.399,110.301 35.399,110.301 40.399,110.301 45.399,110.301 50.399,110.301 55.399,110.301 60.399,110.301 65.399,110.301 70.399,110.301 75.399,110.301 80.399,110.301 85.399,110.301 90.399,110.301 115.399,110.301 120.399,110.301
NetC10_1: C10.1 D8.1 R15.1 | length 40.8
  Top Layer w0.25: v2(68.1,83) 68.1,80.8 69.95,78.95 70.2,78.7 C10.1@70.2,78 ; v1(68.1,102.804) 68.6,103.304 68.6,103.4 71,101 R15.1 72.125,100.875 68.275,97.025 D8.1
  Bottom Layer w0.25: v2(68.1,83) v1(68.1,102.804)
NetC10_2: C10.2 D8.6 D8.9 D8.10 | length 18.6
  Top Layer w0.25: D8.6 69.01,86.46 70.28,87.73 D8.10 D8.9 75.454,86.46 75.6,86.314 75.6,81.3 73,78.7 C10.2@73,78
NetC11_-: C11.- C12.- C13.1 | length 53.3
  Top Layer w0.25: C11.- 30.775,59 30.099,59.676 30.099,64.287 30.988,65.176 30.988,68.402 32.41,69.825 37.059,69.825 v1(38.456,71.222) ; C13.1 33.942,83 31.267,85.675 C12.- 29,86.1 31.2,88.3 37,88.3 38.196,87.104 v2(38.196,86.8)
  Bottom Layer w0.25: v2(38.196,86.8) 38.196,86.496 38.1,86.4 38.475,86.025 38.475,71.933 ; v1(38.456,71.222) 38.456,71.933
NetD1_2: D1.2 D1.9 D1.13 D3.2 D6.3 D6.4 D6.10 | length 85.1
  Top Layer w0.25: v2(71.7,60.7) 71.7,63.22 D6.3 D6.4 ; v1(71.704,65.557) 71.704,65.681 72.216,66.192 73.518,66.192 74.21,66.885 D6.10 ; v2(83.6,60.9) 83.683,60.817 89.494,60.817 v1(89.494,60.518) ; v2(98.6,56.4) 102.272,56.4 v2(102.489,56.617) 102.489,57.175 102.439,57.225 102.085,57.225 101.46,57.85 D3.2 ; v1(111.966,61.366) 112.061,61.366 112.228,61.2 112.8,61.2 117.6,56.4 118.015,56.4 119.19,57.575 D1.2 D1.13 v1(119.19,64.91) ; v1(122.962,64.91) 123.078,64.795 123.35,64.795 124.27,63.875 D1.9
  Bottom Layer w0.25: v1@71.577,65.43 v1@71.651,65.505 ; v1(71.704,65.557) v1@71.651,65.505 ; v2(83.6,60.9) 82.6,59.9 78.8,59.9 78.8,60.7 78.092,60.7 77.967,60.825 73.95,60.825 73.7,60.575 73.1,60.575 72.975,60.7 v2(71.7,60.7) 71.651,60.749 v1@71.651,65.505 ; v1@89.512,60.229 93.544,56.196 94.179,56.196 94.382,56.4 v2(98.6,56.4) ; v2(102.489,56.617) 107.217,56.617 v1(111.966,61.366) ; v1@119.1,65 v1(119.19,64.91) v1(122.962,64.91)
NetD2_7: D2.7 D3.8 | length 73.8
  Top Layer w0.25: 107.747,65.049 v1(107.747,65.481) ; 107.755,65.049 107.755,63.78 D3.8 ; D2.7 110.175,103.85 116.3,97.725 116.3,97.646 116.446,97.5 123.6,97.5 v2(125.6,95.5)
  Bottom Layer w0.25: v1(107.747,65.481) 107.62,65.608 105.147,65.608 103.186,67.569 103.186,68.169 103.617,68.6 120.7,68.6 121.7,69.6 121.7,75.1 125.6,79 v2(125.6,95.5)
NetD3_4: D3.4 D3.10 D6.12 D6.13 D9.14 | length 91.9
  Top Layer w0.25: v1@72.84,67.105 71.67,68.275 D6.12 D6.13 70.4,69.726 71.649,70.975 72.645,70.975 80.638,78.967 81.167,78.967 82.575,80.375 82.575,84.275 85.2,86.9 85.2,86.935 89.17,90.905 D9.14 ; v1(83.566,66.599) 83.633,66.666 87.666,66.666 87.818,66.817 91.817,66.817 93.1,68.1 95.6,68.1 96.2,67.5 96.2,65.746 96.054,65.6 94.1,65.6 93.7,65.2 93.7,62.8 92.6,61.7 92.6,58.183 v1(92.862,58.445) ; v2(98.1,59.9) 99.175,60.975 101.4,60.975 101.501,61.075 102.891,61.075 103.4,60.566 103.4,59.3 D3.4@104,58.7 ; D3.4 D3.4@104,58.7 ; D3.10 105.27,63.3 104,62.03 D3.4@104,58.7
  Bottom Layer w0.25: v1(73.041,67.081) 75.006,67.081 76.327,65.761 77.585,65.761 78.423,66.599 v1(83.566,66.599) ; v1@92.862,58.471 v1(92.862,58.445) 93.717,59.3 97.5,59.3 v2(98.1,59.9)
NetD3_5: D3.5 D3.9 D6.2 XP2.3 | length 146.3
  Top Layer w0.25: XP2.3 22.575,79.035 v2(25.666,79.035) ; v2(68.1,61.7) 70,61.7 70.4,62.1 D6.2 70.4,64.276 70.424,64.3 78.116,64.3 79.175,63.241 79.175,62.8 79.8,62.175 79.8,60.4 89.6,50.6 98.5,50.6 98.5,52.071 97.671,52.9 96,52.9 v1@94.935,53.965 ; v1@94.945,53.975 v1(94.945,54.155) ; v2(100.971,54.4) 101.746,54.4 104.7,57.354 104.7,60.8 105.8,61.9 105.8,62.946 105.895,63.041 105.895,63.08 D3.9@106.274,63.459 ; D3.5 105.27,58.706 106.274,59.71 D3.9@106.274,63.459 ; D3.9 D3.9@106.274,63.459
  Bottom Layer w0.25: v2(25.666,79.035) 27.593,80.962 34.238,80.962 36.3,78.9 36.3,71.521 37.26,70.561 39.061,70.561 41.1,72.6 41.1,79.054 41.246,79.2 45.8,79.2 49.3,75.7 49.3,73.546 49.446,73.4 63.3,73.4 65.8,70.9 65.8,64 v2(68.1,61.7) ; 94.6,54.3 94.7,54.4 v1(94.945,54.155) ; v1@94.945,54.4 v2(100.971,54.4)
NetD3_6: D3.6 D5.7 | length 42.2
  Top Layer w0.25: D3.6 106.54,58.534 108,59.994 v2(108,60.8) ; D5.7 112.45,84.775 113.475,85.8 113.6,85.8 113.52,85.72 113.52,84.329 113.416,84.329 113.27,84.183 v1(113.175,84.183)
  Bottom Layer w0.25: v2(108,60.8) 105.9,60.8 101.77,64.93 101.771,64.931 101.771,68.961 102.785,69.975 107.075,69.975 110.676,73.576 110.676,82.876 112.001,84.201 113.157,84.201 v1(113.175,84.183)
NetD4_12: D4.12 D6.1 | length 28.2
  Top Layer w0.25: D6.1 69.13,63.675 70.387,64.932 73.269,64.932 74.835,66.499 74.835,69.717 75.318,70.2 79.076,70.2 v2(79.807,69.469) ; v1(87.566,72.075) 87.732,72.241 87.732,71.287 88.011,71.007 D4.12
  Bottom Layer w0.25: v2(79.807,69.469) 85.236,69.469 87.4,71.633 87.4,71.91 v1(87.566,72.075)
NetD4_14: D4.14 D8.11 D9.1 | length 55.5
  Top Layer w0.25: v2(71.6,88.8) 72.43,88.8 72.625,88.995 73.72,88.995 D8.11 ; v1(75.086,93.45) 75.088,93.448 80.308,93.448 D9.1 83.745,93.445 v2(85.2,94.9) ; D4.14 85.424,69.32 85.599,69.144 85.599,67.379 v1(85.623,67.523) ; v2(87.617,83.198) 87.617,83.017 87.5,82.9 89,82.9 v2(89.3,83.2) ; v1(88.621,72.034) v2(88.621,78.537)
  Bottom Layer w0.25: v2(71.6,88.8) 71.65,88.85 71.65,93.45 v1(75.086,93.45) ; v2(85.2,94.9) 87.617,92.483 v2(87.617,83.198) ; v1(85.623,67.523) 88.671,70.571 88.671,71.679 88.621,71.73 v1(88.621,72.034) ; v2(88.621,78.537) 88.621,79.421 89.3,80.1 v2(89.3,83.2)
NetD5_1: D5.1 R4.2 | length 10.3
  Top Layer w0.25: D5.1 111.651,77.155 111.838,76.968 115.879,72.926 115.879,71.161 R4.2@118.048,71.161
NetD5_2: D5.2 R3.2 | length 6.8
  Top Layer w0.25: D5.2 112.45,78.425 113.375,77.5 R3.2
NetD5_3: D5.3 R2.2 | length 8.3
  Top Layer w0.25: D5.3 113.495,79.695 115.814,82.015 115.814,82.139 118.25,84.575 R2.2
NetD5_4: D5.4 R1.2 | length 14.2
  Top Layer w0.25: D5.4 114.128,80.965 115.364,82.201 115.364,82.554 115.509,82.7 115.509,83.053 116.6,84.144 116.6,89.525 118.35,91.275 R1.2
NetD5_12: D5.12 R8.2 | length 14.1
  Top Layer w0.25: R8.2 v2(99.6,90.6) ; v2(104.5,82.3) 104.532,82.268 106.542,82.268 D5.12
  Bottom Layer w0.25: v2(99.6,90.6) 99.6,87.2 v2(104.5,82.3)
NetD5_13: D5.13 R7.2 | length 13.3
  Top Layer w0.25: R7.2 98.45,72.225 101.444,75.219 101.631,75.219 104.275,77.864 104.275,78.05 104.572,78.347 104.572,80.69 104.846,80.965 D5.13
NetD5_14: D5.14 R6.2 | length 12.4
  Top Layer w0.25: R6.2 98.15,85 v2(99.7,85) ; v2(105.3,79.8) 105.352,79.748 106.523,79.748 D5.14
  Bottom Layer w0.25: v2(99.7,85) 99.7,82.4 102.3,79.8 v2(105.3,79.8)
NetD5_15: D5.15 R5.2 | length 9.2
  Top Layer w0.25: R5.2 98.45,78.4 103.206,78.4 v1(103.506,78.1) ; 105.205,77.905 105.566,77.905 v1(105.588,77.927) 105.652,77.927 106.15,78.425 D5.15
  Bottom Layer w0.25: v1(103.506,78.1) 103.806,77.8 105.1,77.8 105.205,77.905 105.566,77.905 v1(105.588,77.927)
NetD6_11: D6.11 D7.14 | length 29.3
  Top Layer w0.25: 52.67,77.505 52.67,80.3 D7.14 ; v1(52.67,77.813) 52.67,78.121 52.68,78.13 ; v1(69.669,71.984) 69.952,71.7 v2(72,71.7) ; v2(72.4,70.2) 72.4,69.632 72.94,69.093 D6.11
  Bottom Layer w0.25: v1(52.67,77.813) 52.67,77.505 52.738,77.437 62.875,77.437 67.933,72.378 69.075,72.378 69.469,71.984 v1(69.669,71.984) ; v2(72,71.7) 71.825,71.525 71.825,70.775 v2(72.4,70.2)
NetD7_3: D7.3 R9.1 | length 10.1
  Top Layer w0.25: R9.1 48.025,67.7 48.325,68 49.001,68 53.095,72.094 D7.3
NetD7_4: D7.4 R10.1 | length 10.6
  Top Layer w0.25: R10.1 54.025,67.35 54.325,67.65 55.534,67.65 56.5,68.616 56.5,72.2 54.525,74.175 54.525,75.115 D7.4
NetD7_5: D7.5 R12.1 | length 11.7
  Top Layer w0.25: D7.5 55.635,75.071 55.46,74.896 55.404,74.896 55.542,74.757 56.6,73.7 57.554,73.7 57.7,73.554 57.7,67.8 58.5,67 R12.1
NetD7_9: D7.9 R13.1 | length 10.3
  Top Layer w0.25: R13.1 54.05,87.4 v2(56.2,87.4) ; D7.9 59.473,80.752 59.473,82.173 v2(59.5,82.2)
  Bottom Layer w0.25: v2(56.2,87.4) 59.5,84.1 v2(59.5,82.2)
NetD7_10: D7.10 R11.1 | length 17
  Top Layer w0.25: D7.10 58.175,79.325 58.846,78.654 59.054,78.654 61,80.6 61.1,80.6 v1(61.45,80.95) ; R11.1 61.3,87.4 63.578,87.4 64.8,86.178 64.8,84.5 v1(63.322,83.022)
  Bottom Layer w0.25: v1(61.45,80.95) 61.8,81.3 61.8,81.4 v1@63.322,82.922 ; v1@63.322,82.906 v1@63.322,82.922 ; v1(63.322,83.022) v1@63.322,82.922
NetD7_12: D7.12 R14.1 | length 15
  Top Layer w0.25: R14.1 48,85.821 v1(48.571,85.821) ; D7.12 55.618,80.742 55.618,81.909 56.108,82.4 v2(57.1,82.4)
  Bottom Layer w0.25: v1(48.571,85.821) v1@48.616,85.776 ; v1@48.641,85.75 v1@48.616,85.776 ; v2(57.1,82.4) 55.425,84.075 51.5,84.075 49.799,85.776 v1@48.616,85.776
NetD8_3: D8.3 D8.4 D8.5 | length 2.5
  Top Layer w0.25: D8.5 D8.4 D8.3
NetD8_8: D8.8 D8.12 D8.13 R15.2 | length 25.4
  Top Layer w0.25: v2(70.666,90.865) 71.246,90.285 73.71,90.285 D8.12 D8.13 73.792,91.473 74.748,91.473 74.934,91.288 v1(75.082,91.288) ; v2(71.5,86.9) 71.5,86.389 72.699,85.19 D8.8 ; R15.2 v2(75.66,101)
  Bottom Layer w0.25: v2(70.666,90.865) 70.666,88.381 71.5,87.547 v2(71.5,86.9) ; v1(75.082,91.288) 75.711,91.916 75.711,100.949 v2(75.66,101)
NetD9_6: D9.6 D9.9 | length 14.3
  Top Layer w0.25: D9.6 83.4,87.095 84.646,88.341 84.944,88.639 v1(85.03,88.725) ; v2(85.014,84.836) 86.285,84.836 86.349,84.9 86.694,84.555 D9.9
  Bottom Layer w0.25: v2(85.014,84.836) v1@85.014,88.709 ; v1(85.03,88.725) v1@85.014,88.709 ; v1@85.147,88.842 v1@85.014,88.709
NetR9_2: R9.2 VD1.A | length 15.8
  Top Layer w0.25: VD1.A 39.677,57 46.965,64.287 46.965,67.999 47.415,68.45 47.675,68.45 47.675,68.7 47.975,69 R9.2
NetR10_2: R10.2 VD2.A | length 14.1
  Top Layer w0.25: VD2.A 49.73,65.58 52.8,68.65 R10.2
NetR11_2: R11.2 VD3.A | length 9.2
  Top Layer w0.25: VD3.A 60.46,89.515 60.975,89 R11.2
NetR12_2: R12.2 VD4.A | length 15.5
  Top Layer w0.25: VD4.A 59.73,64.83 62,67.1 62,69.1 61.854,69.246 61.646,69.246 60.7,68.3 R12.2
NetR13_2: R13.2 VD5.A | length 10.7
  Top Layer w0.25: VD5.A 50.73,91.895 53.975,88.65 R13.2
NetR14_2: R14.2 VD6.A | length 12.4
  Top Layer w0.25: VD6.A 40.73,95.895 47.975,88.65 R14.2
NetR16_2: R16.2 VD7.C | length 5
  Top Layer w0.25: VD7.C 31.84,99.3 R16.2
ON/OFF: D8.2 XP2.1 | length 57.2
  Top Layer w0.25: XP2.1 24.08,78 27.3,78 v2(28.592,76.708) ; v2(33.172,78.511) 34.861,80.2 45.4,80.2 49.9,84.7 51.6,86.4 v2(63.2,86.4) ; v2(64.7,90) 64.7,91.7 64.86,91.54 D8.2
  Bottom Layer w0.25: v2(28.592,76.708) 29,76.3 30.4,76.3 32.611,78.511 v2(33.172,78.511) ; v2(63.2,86.4) 64.7,87.9 v2(64.7,90)
Out1_N: D2.6 XP1.2 | length 32
  Top Layer w0.3: D2.6 108.905,103.85 108.755,103.7 108.746,103.7 108.57,103.524 108.57,102.271 109.446,101.396 109.506,101.396 109.652,101.25 v1(109.652,101.346) ; v1(128.582,89.567) 128.582,89.486 128.766,89.302 128.766,89.242 130.03,87.978 130.03,86.78 130.65,86.16 XP1.2
  Difpairs w0.3: v1@109.771,101.211 115.494,95.489 122.519,95.489 125.649,92.358 128.256,89.752 128.316,89.752 128.501,89.567 v1(128.582,89.567)
Out1_P: D2.5 XP1.1 | length 32
  Top Layer w0.3: D2.5 107.635,103.85 107.785,103.7 107.794,103.7 107.97,103.524 107.97,102.023 109.021,100.972 109.021,100.911 109.206,100.727 v1(109.206,100.646) ; v1(128.016,89.002) 128.097,89.002 128.281,88.817 128.342,88.817 129.43,87.729 129.43,87.036 129.254,86.86 129.16,86.86 XP1.1
  Difpairs w0.3: v1(109.206,100.646) 109.488,100.646 115.245,94.889 122.27,94.889 125.049,92.11 127.832,89.327 127.832,89.267 128.016,89.083 v1(128.016,89.002)
Out2_N: D5.6 XP1.10
Out2_P: D5.5 XP1.9
Reset: D4.15 D7.15 D9.7 D9.15 XP2.2 | length 125.9
  Top Layer w0.25: XP2.2 23.063,71.397 v2(23.063,70.51) ; v2(32.969,80.061) 34.608,81.7 v2(39.2,81.7) ; v2(40.6,85.4) 42,84 48,84 v2(50.3,86.3) ; v2(51.8,84.8) 51.2,84.2 51.2,81.35 D7.15 51.825,83.7 61.2,83.7 69,75.9 74.4,75.9 78.2,79.7 v2(78.207,79.527) 78.207,80.057 78.375,80.225 78.3,80.3 78.3,82.026 77.813,82.513 77.813,83.197 78.3,83.683 78.3,85.6 78.525,85.825 D9.7 83.283,85.825 87.617,90.158 87.617,90.717 89.075,92.175 D9.15 ; v2(77.521,74.825) 77.725,74.825 80.53,72.021 80.53,71.026 81.153,70.404 v2(81.153,68.555) ; v1(84.094,67.793) 84.189,67.698 84.189,69.355 D4.15
  Bottom Layer w0.25: v2(23.063,70.51) 23.063,74.963 23.36,75.26 24.912,75.26 27.852,78.2 29.404,78.2 31.265,80.061 v2(32.969,80.061) ; v2(39.2,81.7) 39.2,84 v2(40.6,85.4) ; v2(50.3,86.3) v2(51.8,84.8) ; v2(77.521,74.825) 78.375,75.679 78.207,75.848 78.207,76.44 78.225,76.458 78.225,77.142 78.207,77.16 v2(78.207,79.527) 78.207,79.693 v2@78.2,79.7 ; v2(81.153,68.555) 81.445,68.555 82.258,67.742 83.693,67.742 ; 83.693,67.793 v1(84.094,67.793)
S0: D2.11 D9.3 | length 52.6
  Top Layer w0.25: v2(78.867,90.754) 79.018,90.905 D9.3 ; D2.11 v2(108.905,111.811)
  Bottom Layer w0.25: v2(78.867,90.754) 78.867,91.389 79.375,91.897 79.375,93.777 78.969,94.183 78.574,94.183 78.428,94.33 78.428,94.766 78.574,94.913 79,94.913 79.146,95.059 79.146,95.326 78.892,95.58 78.574,95.58 78.428,95.727 78.428,96.011 78.574,96.157 78.873,96.157 79.019,96.304 79.019,96.704 78.873,96.85 78.574,96.85 78.428,96.997 78.428,97.357 78.574,97.503 79.146,97.503 ; 79.146,97.536 79.146,101.702 90.279,112.834 105.261,112.834 106.081,112.014 108.702,112.014 v2(108.905,111.811)
S1: D2.10 D9.4 | length 53.7
  Top Layer w0.25: v2(77.978,90.018) 78.589,89.406 80.081,89.406 D9.4 ; v1(110.16,111.252) 110.16,109.74 D2.10
  Bottom Layer w0.25: v2(77.978,90.018) 77.978,101.244 90.043,113.309 105.639,113.309 106.198,112.75 108.991,112.75 110.16,111.581 v1(110.16,111.252)
S2: D2.9 D9.5 | length 52.5
  Top Layer w0.25: v2(78.308,88.544) 78.488,88.365 D9.5 ; v2(111.445,108.153) D2.9
  Bottom Layer w0.25: v2(78.308,88.544) 80.112,90.348 80.112,94.463 82.093,96.444 86.671,96.444 86.817,96.297 86.817,95.402 89.611,95.402 89.611,96.348 89.758,96.495 92.056,96.495 92.202,96.348 92.202,95.529 94.132,95.529 94.132,96.424 94.279,96.571 95.916,96.571 96.063,96.424 96.063,95.479 98.77,95.479 v2(111.445,108.153)
S3: D5.11 D9.11 | length 52.4
  Top Layer w0.25: v2(88.392,86.563) 88.416,87.095 D9.11 ; v2(97.358,86.563) 98.019,86.36 101.93,86.36 104.785,83.505 D5.11
  Bottom Layer w0.25: v2(88.392,86.563) 92.437,86.563 92.659,86.341 92.659,80.62 92.378,80.338 92.044,80.338 91.897,80.485 91.897,83.007 91.62,83.285 91.413,83.285 91.262,83.134 91.262,79.934 90.373,79.934 90.373,82.45 90.223,82.601 90.016,82.601 89.865,82.45 89.865,78.756 89.026,77.917 89.026,77.71 89.173,77.564 90.627,77.564 95.45,82.386 95.45,84.655 v2(97.358,86.563)
S4: D5.10 D9.12 | length 52.6
  Top Layer w0.25: D9.12 91.464,88.365 92.1,89.002 v2(92.1,92.507) ; D5.10 107.493,84.775 107.823,85.105 v2(107.823,90.856)
  Bottom Layer w0.25: v2(92.1,92.507) 90.703,93.904 90.703,94.697 90.85,94.844 91.237,94.844 94.338,91.743 94.545,91.743 94.691,91.889 94.691,92.431 92.458,94.664 92.458,94.871 92.666,95.079 93.033,95.079 95.791,92.322 96.29,92.322 96.437,92.468 96.437,92.971 94.689,94.719 94.689,94.926 94.836,95.072 95.326,95.072 97.409,92.989 97.942,93.523 97.942,93.751 97.019,94.675 97.019,94.882 97.828,94.882 100.432,92.278 105.943,92.278 106.172,92.507 v2(107.823,90.856)
S5: D5.9 D9.13 | length 52.5
  Top Layer w0.25: D9.13 v2(91.364,89.635) ; v2(106.07,91.389) 106.578,90.881 106.578,86.045 D5.9
  Bottom Layer w0.25: v2(91.364,89.635) 91.364,89.606 91.897,89.072 91.897,88.265 92.735,87.427 93.275,87.427 93.421,87.573 93.421,88.367 92.812,88.976 92.812,90.483 92.958,90.629 93.165,90.629 93.751,90.043 93.751,89.078 94.765,88.064 94.973,88.064 95.148,88.24 95.148,89.822 95.295,89.969 95.502,89.969 96.545,88.925 96.983,88.925 97.13,89.072 97.13,89.459 95.404,91.184 95.404,91.391 95.885,91.872 96.342,91.872 98.249,89.965 98.456,89.965 98.603,90.111 98.603,91.7 98.749,91.846 99.898,91.846 100.457,91.288 100.457,88.841 100.603,88.695 100.811,88.695 101.117,89.002 101.117,91.294 101.264,91.44 101.6,91.44 102.032,91.008 102.032,89.546 102.178,89.4 102.481,89.4 102.895,89.814 102.895,91.042 103.042,91.188 103.249,91.188 103.784,90.653 103.784,89.535 103.937,89.383 104.216,89.383 104.445,89.611 104.445,90.846 104.591,90.993 104.798,90.993 105.054,90.737 105.054,89.603 105.201,89.457 105.408,89.457 106.07,90.119 v2(106.07,91.389)
STROB0: D1.1 D4.3 | length 50.6
  Top Layer w0.25: D4.3 85.325,64.063 85.325,64.973 86.194,65.842 87.076,65.842 87.402,65.9 v1(87.402,66.041) ; v2(93.5,74.1) 93.5,73.275 100.175,66.6 111.5,66.6 111.6,66.5 v1(111.705,66.395) ; v1(114.348,63.402) 114.348,63.3 112.2,63.3 117.096,58.404 117.758,58.404 117.92,58.242 D1.1
  Bottom Layer w0.25: v1@87.452,66.091 v1(87.402,66.041) 87.402,67.447 93.5,73.545 v2(93.5,74.1) ; v1(111.705,66.395) 111.705,65.995 114.021,63.679 ; 114.046,63.703 v1(114.348,63.402)
STROB1: D4.2 D6.5 | length 17.6
  Top Layer w0.25: v2(73.4,61.3) 74.205,62.105 74.205,63.245 D6.5 ; D4.2 84.201,64.342 83.776,64.767 83.776,64.878 v1(84.531,65.634)
  Bottom Layer w0.25: v2(73.4,61.3) 77.478,61.3 79.175,62.997 79.175,63.4 81.375,65.6 v1@84.455,65.6
STROB2: D1.10 D4.4 | length 50.4
  Top Layer w0.25: D4.4 86.741,62.026 v1(87.302,61.465) ; v2(112.9,55.4) 113.5,54.8 122.3,54.8 123.625,56.125 123.625,60.465 122.871,61.219 122.871,61.819 123.425,62.373 123.425,62.6 123,63.025 D1.10
  Bottom Layer w0.25: v1(87.302,61.465) 87.302,61.398 93.3,55.4 v2(112.9,55.4)
STROB3: D3.12 D4.7 | length 20.5
  Top Layer w0.25: v1(90.488,62.573) v1@90.563,62.649 ; D4.7 90.563,63.905 v1@90.563,62.649 ; v1@90.576,62.662 v1@90.563,62.649 ; v2(93.6,60.2) 93.6,62 94.8,63.2 94.8,63.8 95.6,63.8 v2(96.7,64.9) ; v1(102.049,62.425) 102.475,62.425 ; 102.305,62.595 102.305,62.84 102.73,63.265 D3.12
  Bottom Layer w0.25: v1(90.488,62.573) 90.488,61.812 92.1,60.2 v2(93.6,60.2) ; v2(96.7,64.9) 99.574,64.9 v1(102.049,62.425)
STROB4: D3.1 D4.10 | length 18.8
  Top Layer w0.25: v1(90.449,67.769) v1@90.449,67.996 ; v1@90.514,67.78 90.514,69.33 D4.10 ; v1(98.222,57.404) 98.226,57.4 98.6,57.4 99.175,57.975 100.028,57.975 100.19,58.137 D3.1
  Bottom Layer w0.25: v1(90.449,67.769) 94.267,63.951 95.074,63.951 98.825,60.2 98.825,58.566 98.273,58.014 98.273,57.455 v1(98.222,57.404)
STROB5: D1.4 D4.1 | length 70.1
  Top Layer w0.25: v2(78.994,61.595) 78.994,59.906 91.224,47.676 122.876,47.676 125.3,50.1 v2(125.3,53.9) ; v1(82.576,62.391) 82.931,62.746 D4.1 ; v2(121.7,55.8) 121.715,55.815 121.715,57.985 D1.4
  Bottom Layer w0.25: v2(78.994,61.595) 81.895,61.595 82.576,62.276 v1(82.576,62.391) ; v2(121.7,55.8) 123.6,53.9 v2(125.3,53.9)
STROB6: D1.12 D4.5 | length 39
  Top Layer w0.25: D4.5 88.011,65.119 89.259,66.367 94.494,66.367 94.494,66.421 v2(95.352,66.421) ; v1(98.44,69.218) 98.44,69.149 v1@98.495,69.095 ; v1@98.6,69.2 100.656,67.144 104.212,67.144 104.293,67.225 118.575,67.225 120.46,65.34 D1.12
  Bottom Layer w0.25: v2(95.352,66.421) 98.025,69.095 v1@98.288,69.095 ; v1@98.288,69.123 98.384,69.218 v1(98.44,69.218) ; v1@98.44,69.095 v1@98.495,69.095
STROB7: D4.6 D6.9 | length 21.7
  Top Layer w0.25: D6.9 75.48,69.726 75.504,69.75 78.5,69.75 79.9,68.35 v2(79.9,63.1) ; v1(88.161,62.6) 88.209,62.648 88.436,62.648 89.281,63.492 D4.6
  Bottom Layer w0.25: v2(79.9,63.1) 82.9,63.1 83.4,62.6 v1(88.161,62.6)
pads on no net: D4.9 D4.11 D7.1 D7.2 D7.6 D7.7 D7.11 Designator6.reper Designator7.reper XP2.4 XP2.5 XP2.6

## Polygon pours and split planes (outlines as drawn)
+5V on Top Layer "+5V_L01_P021" (solid, remove dead copper, pour order 21): 31.674,61.671 31.598,61.747 31.598,67.869 42.367,67.869 42.52,68.021 42.57,67.97 42.57,61.773
no net on Top Layer "NONET_L01_P013" (solid, remove dead copper, pour order 13): 8,102.1 15.908,102.1 15.951,102.057 15.951,114.046 134.01,114.046 134.01,102.057 141.757,102.057 142.062,101.752 142.062,58.242 134.163,58.242 133.96,58.039 133.96,46.838 16.053,46.838 16.053,58.039 8.103,58.039 8,58.142
no net on Top Layer "NONET_L01_P004" (solid, remove dead copper, pour order 4): 8,102.1
+9V on Top Layer "+9V_L01_P002" (solid, remove dead copper, pour order 2): 34.3,73.4
no net on Bottom Layer "NONET_L04_P015" (solid, remove dead copper, pour order 15): 7.976,101.956 8.052,102.032 15.977,102.032 15.977,113.97 16.002,113.995 134.01,113.995 134.01,102.006 141.986,102.006 141.986,57.988 133.96,57.988 133.96,47.015 16.002,47.015 16.002,57.988 15.951,58.039 8.001,58.039 8.001,102.006

## Silkscreen, mask and mechanical layers (free items; w line width, h text height)
Top Overlay:
  drawing of 3 lines, arcs and shapes, not listed
Mechanical 5:
  text "CA010M0010REB-0405" at 109,101 h1.52